# Altium PCB PSNEM-MAIN-BOARD.PcbDoc
Units mil, origin at the board's own origin, x right, y up, seen from the top; angles counter-clockwise.
Board outline 7940 x 5930 mil, 6 copper layers (Top Layer, 5V, 3.3V, GROUND, Layer 2, Bottom Layer), stack 32.112 mil thick; 62 components, 38 nets, 237 pads, 14 vias.
Unrouted connection lines stored in the file: 118.
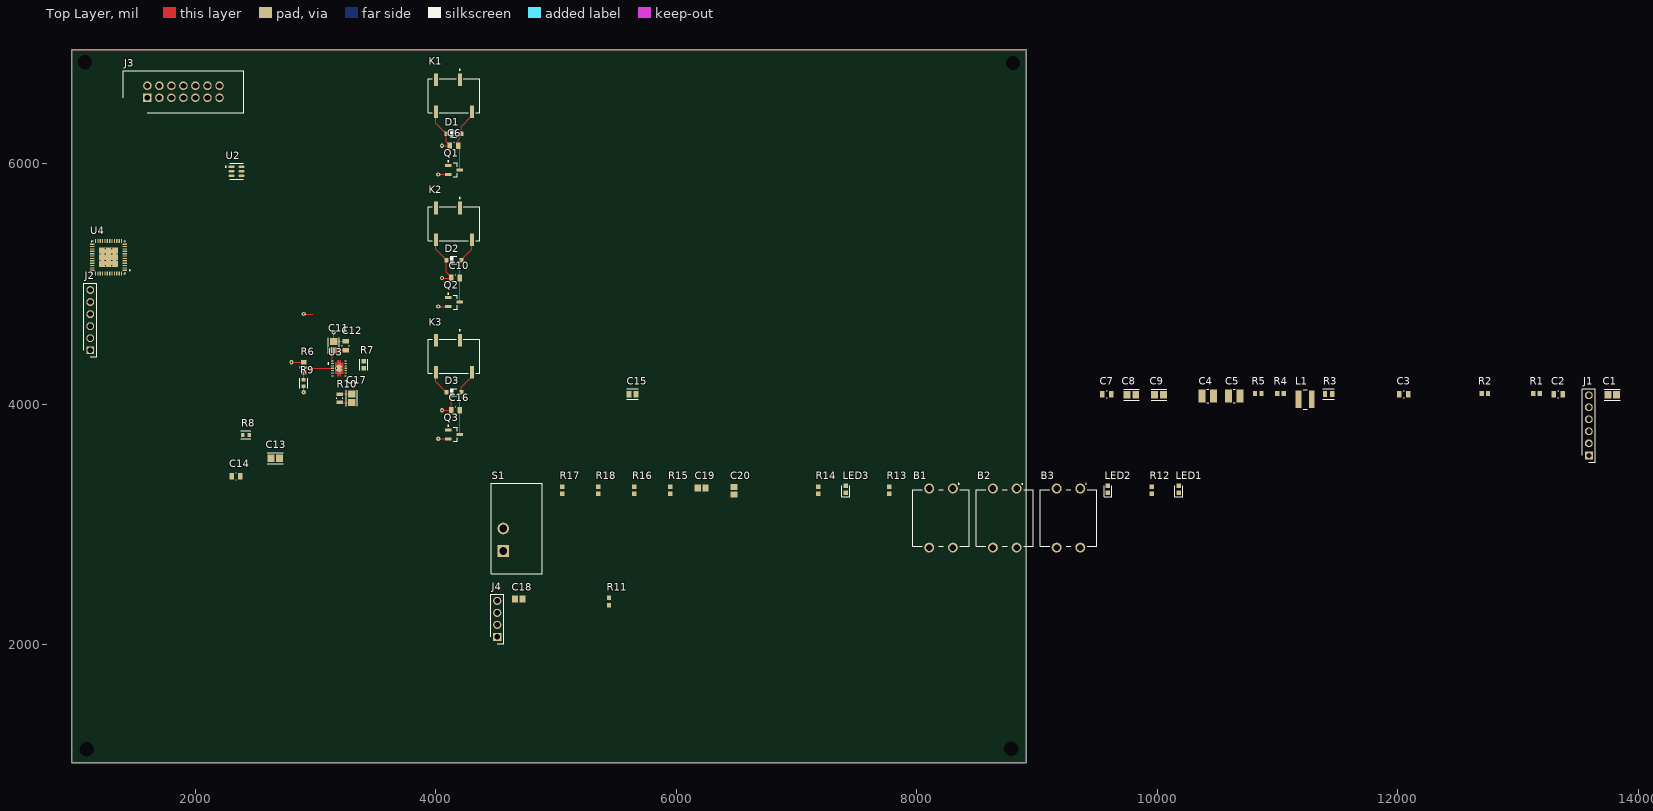
[diagram p0: Top Layer view]
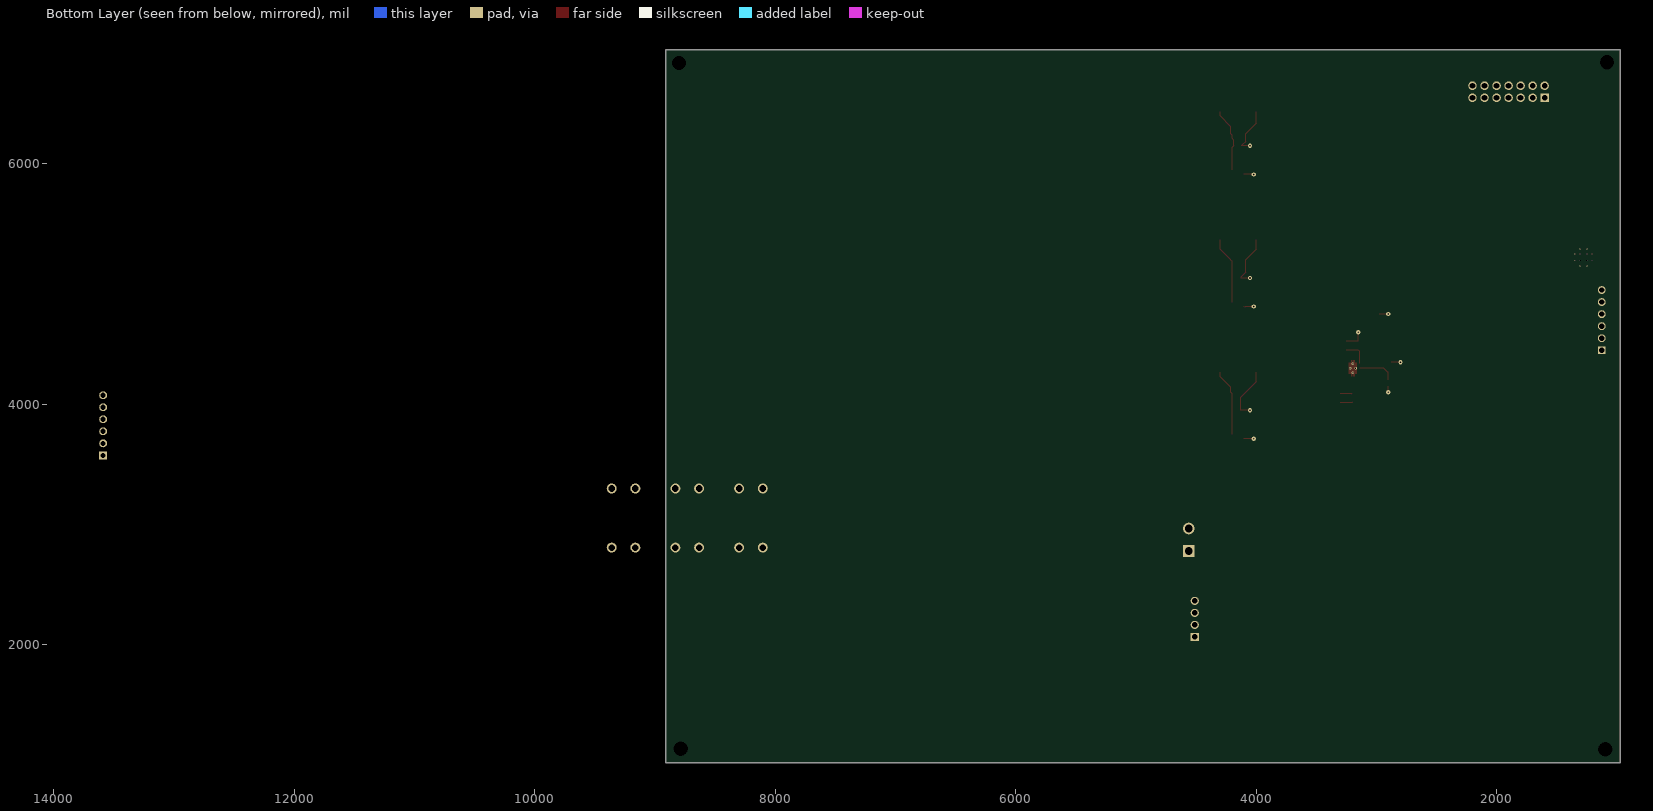
[diagram p1: Bottom Layer view, seen from below]
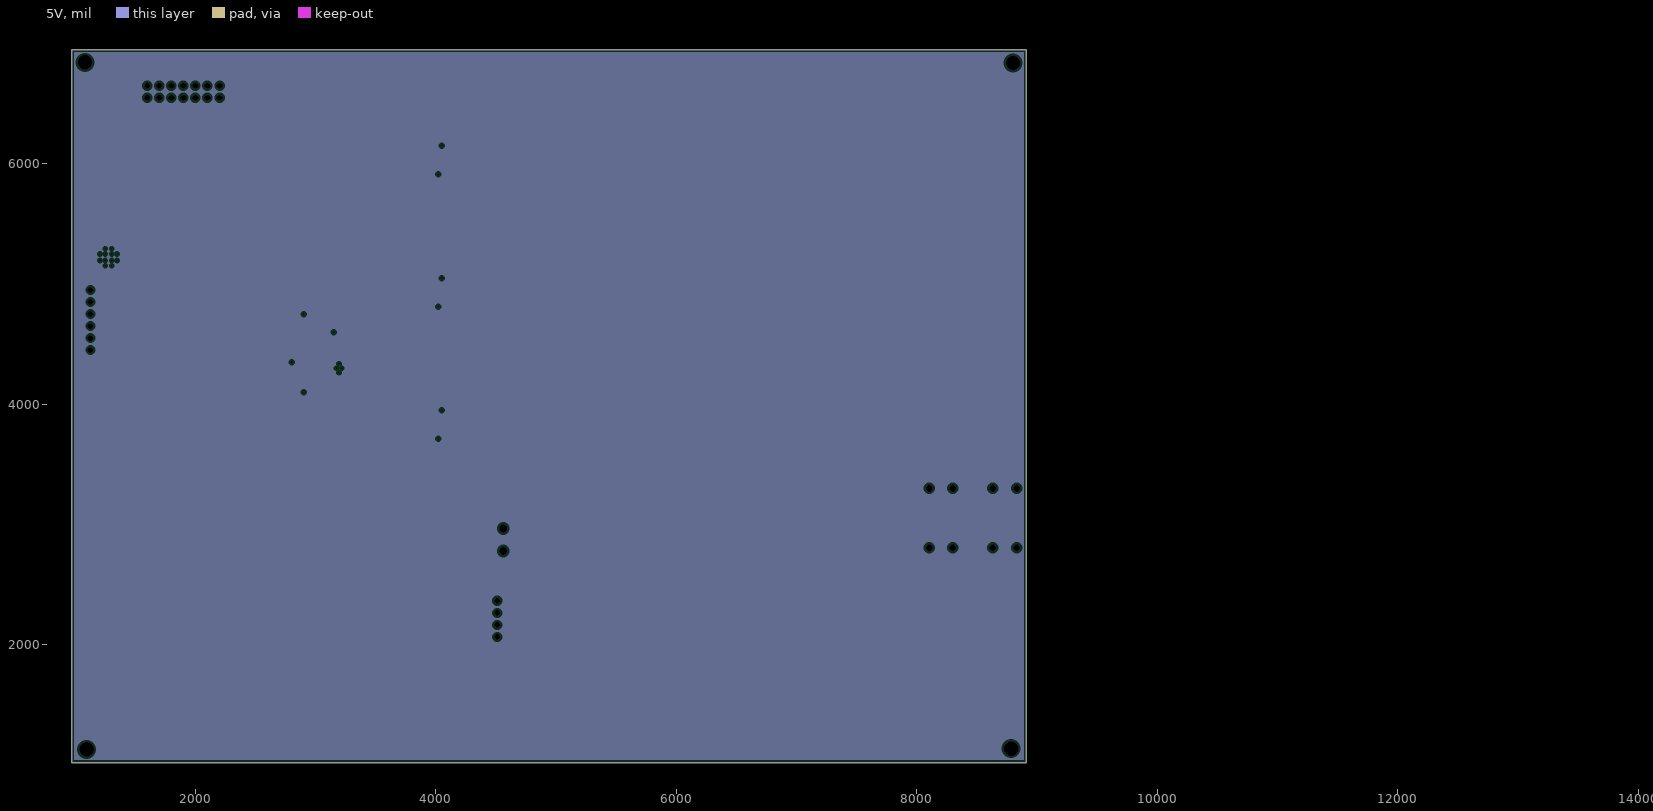
[diagram p2: 5V, clearances drawn from the general rule]
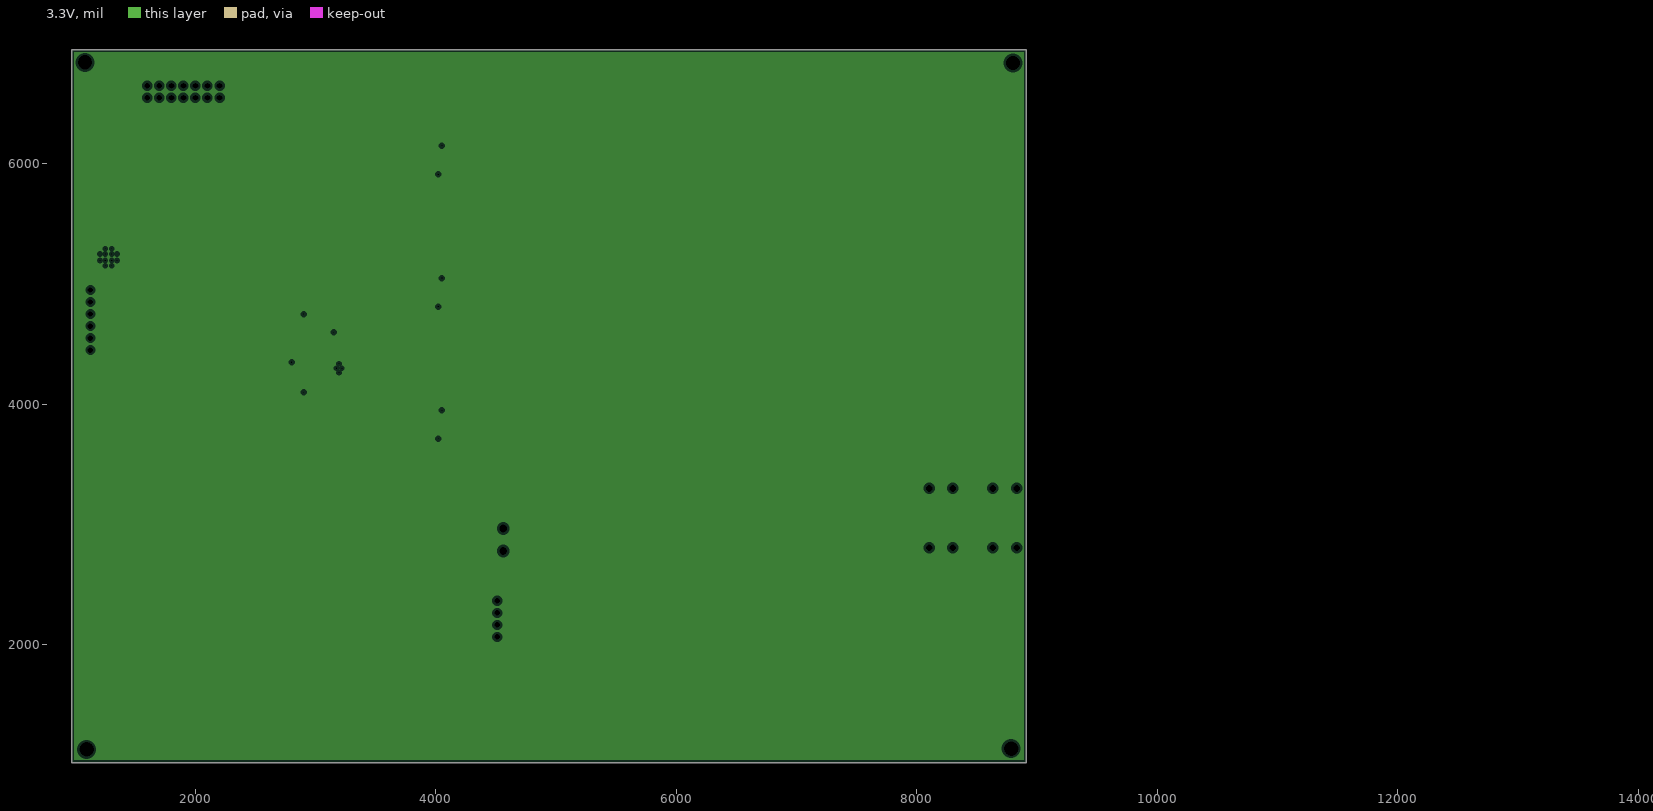
[diagram p3: 3.3V, clearances drawn from the general rule]
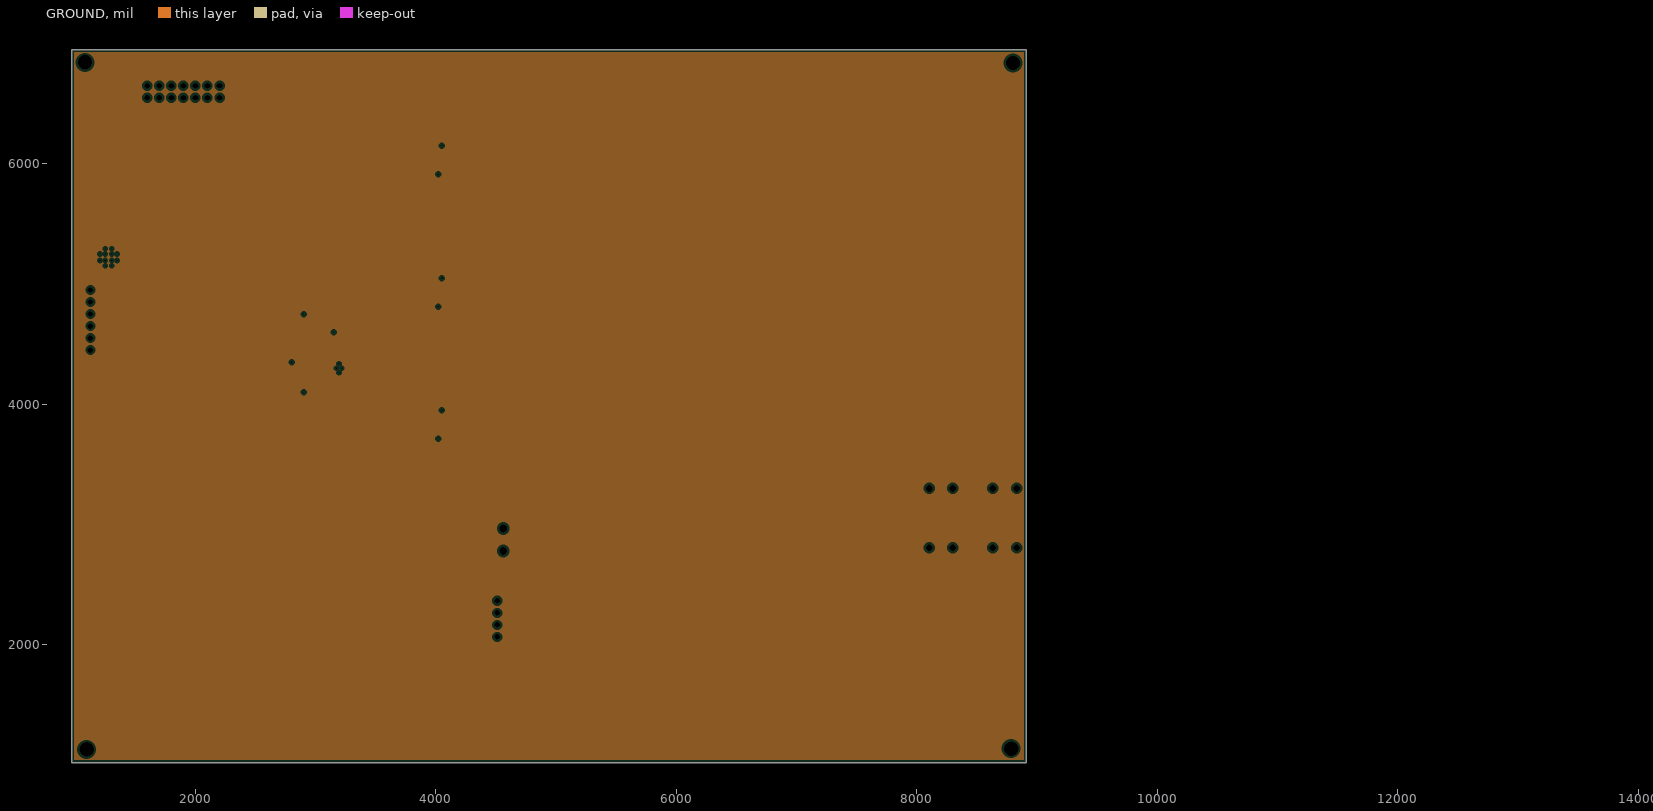
[diagram p4: GROUND, clearances drawn from the general rule]
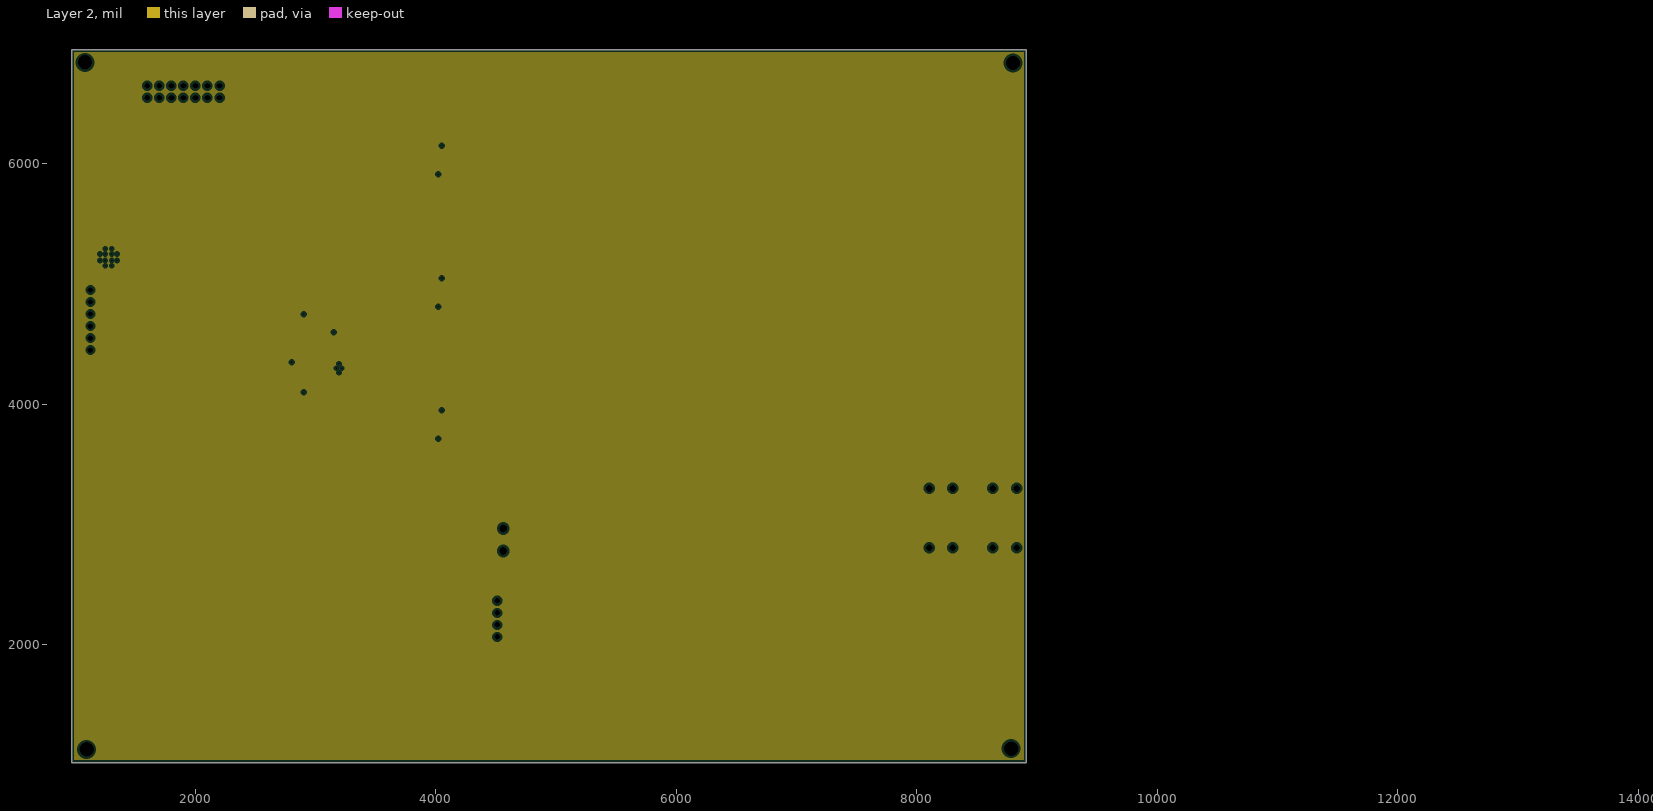
[diagram p5: Layer 2, clearances drawn from the general rule]

## Layer stack, top to bottom
Top Solder: solder mask 0.4, Solder Resist, Dk 3.5
Top Layer: signal copper 1.4
Dielectric 4: prepreg 2.8, PP-006, Dk 4.1
5V: plane copper 1.378
Dielectric 2: prepreg 2.8, PP-006, Dk 4.1
3.3V: plane copper 1.378
Dielectric 1: dielectric 12.6, FR-4, Dk 4.8
GROUND: plane copper 1.378
Dielectric 3: prepreg 2.8, PP-006, Dk 4.1
Layer 2: plane copper 1.378
Dielectric 5: prepreg 2.8, PP-006, Dk 4.1
Bottom Layer: signal copper 1.4
Bottom Solder: solder mask 0.4, Solder Resist, Dk 3.5

## Board outline
970,1020 970,6950 8910,6950 8910,1020

## Design rules (kind name [scope] priority, off if disabled: settings)
Clearance [All] p1: gap=10 ignorepadtopadclearanceinfootprint=FALSE
PlaneClearance [All] p1: clearance=20
PlaneConnect [All] p1: planeconnectstyle=Relief reliefexpansion=20 reliefentries=4 reliefconductorwidth=10 reliefairgap=10
PolygonConnect [All] p1: connectstyle=Relief reliefconductorwidth=10 reliefentries=4 polygonreliefangle="90 Angle" airgapwidth=10
RoutingVias [All] p1: holewidth=28 width=50 viastyle="Through Hole" minholewidth=28 minwidth=50 maxholewidth=28 maxwidth=50
SolderMaskExpansion [All] p1: expansion=4 istentingtop=FALSE
SupplyNets "Schematic Supply Nets_2" [InNet('+5V')] p1: voltage=0.000
SupplyNets "Schematic Supply Nets_1" [InNet('+3.3V')] p2: voltage=0.000
SupplyNets "Schematic Supply Nets" [InNet('GND')] p3: voltage=0.000
Width [All] p1: maxlimit=10 minlimit=10 preferedwidth=10
28 further rules are at their usual default settings.

## Classes and differential pairs
component class U_PowerDACSUB: C1 C2 C3 C4 C5 C6 C7 C8 C9 C10 C11 C12 C13 C14 C15 C16 C17 D1 D2 D3 J1 J2 K1 K2 K3 L1 Q1 Q2 Q3 R1 R2 R3 R4 R5 R6 R7 R8 R9 R10 U1 U2 U3
component class U_MicroController: B1 B2 B3 C19 C20 LED1 LED2 LED3 R12 R13 R14 R15 R16 R17 R18 S1 U4
component class U_Connectors: C18 J3 J4 R11

## Components (designator, comment, footprint, x,y, rotation, side; value= is the part's Value field where it differs from the comment)
B1 "FSM101" FSM101 8190,3050 r90 top
B2 "FSM101" FSM101 8720,3050 r90 top
B3 "FSM101" FSM101 9250,3050 r90 top
C1 "10u" FP-CL21-IPC_A 13785,4080 r0 top
C2 "0.1u" FP-CC0805-0_85-MFG 13335,4085 r0 top value="100 nF"
C3 "0.1u" FP-CC0805-0_85-MFG 12050,4085 r0 top value="100 nF"
C4 "22u" FP-CL32-IPC_C 10420,4070 r0 top
C5 "22u" FP-CL32-IPC_C 10640,4070 r0 top
C6 "0.1u" FP-CC0805-0_85-MFG 4150,6150 r0 top value="100 nF"
C7 "0.1u" FP-CC0805-0_85-MFG 9580,4085 r0 top value="100 nF"
C8 "10u" FP-CL21-IPC_A 9785,4080 r0 top
C9 "10u" FP-CL21-IPC_A 10015,4080 r0 top
C10 "0.1u" FP-CC0805-0_85-MFG 4163.58,5050 r0 top value="100 nF"
C11 "10u" FP-CL21-IPC_A 3150,4486.45 r270 top
C12 "0.1u" FP-CC0805-0_85-MFG 3250,4486.42 r270 top value="100 nF"
C13 "10u" FP-CL21-IPC_A 2663.55,3550 r0 top
C14 "0.1u" FP-CC0805-0_85-MFG 2336.42,3400 r0 top value="100 nF"
C15 "10u" FP-CL21-IPC_C 5635,4085 r0 top
C16 "0.1u" FP-CC0805-0_85-MFG 4163.58,3950 r0 top value="100 nF"
C17 "4.7u" FP-CL21-IPC_A 3300,4050 r270 top
C18 "2.2n" "0805 Cap" 4690,2380 r0 top
C19 "1u" "0805 Cap" 6210,3305 r0 top
C20 "0.1u" "0805 Cap" 6480,3280 r90 top
D1 "1N4148W-7-F" DIOD-SOD123-2_V 4150,6250 r180 top
D2 "1N4148W-7-F" DIOD-SOD123-2_V 4150,5200 r180 top
D3 "1N4148W-7-F" DIOD-SOD123-2_V 4150,4100 r180 top
J1 "61300611121" 61300611121 13590,3575 r90 top
J2 "61300611121" 61300611121 1125,4450 r90 top
J3 "0702461402" 0702461402 1900,6600 r0 top
J4 "61300411121" 61300411121 4510,2215 r90 top
K1 "G6L-1F-DC5" FP-G6L-1F-DC5-MFG 4150,6567.32 r180 top
K2 "G6L-1F-DC5" FP-G6L-1F-DC5-MFG 4150,5500 r180 top
K3 "G6L-1F-DC5" FP-G6L-1F-DC5-MFG 4150,4400 r180 top
L1 "3.3u" FP-NR4018-MFG 11230,4040 r0 top
LED1 "150060VS75000" 150060VS75000 10180,3295 r90 top
LED2 "150060VS75000" 150060VS75000 9590,3295 r90 top
LED3 "150060VS75000" 150060VS75000 7410,3295 r90 top
Q1 "2N7002" INF-PG-SOT23_M#1 4150,5950 r0 top
Q2 "2N7002" INF-PG-SOT23_M#2 4150,4850 r0 top
Q3 "2N7002" INF-PG-SOT23_M#2 4150,3750 r0 top
R1 "10k" RESC1609X50X30ML10T20 13155,4090 r0 top
R2 "10k" RESC1609X50X30ML10T20 12725,4090 r0 top
R3 "33.2k" FP-CR0805-IPC_C 11425,4085 r0 top
R4 "10k" RESC1609X50X30ML10T20 11025,4090 r0 top
R5 "10k" RESC1609X50X30ML10T20 10840,4090 r0 top
R6 "22.6k" FP-RT0805-MFG 2900,4308.66 r90 top value=22.6KΩ
R7 "1.5M" FP-MCR03-IPC_B 3400,4328.62 r90 top
R8 "100k" FP-RK73H1J-IPC_C 2420,3745 r0 top
R9 "100k" FP-RK73H1J-IPC_C 2900,4176.59 r90 top
R10 "22.1k" FP-CRCW0805-e3-IPC_C 3200,4050 r90 top
R11 "47K" RESC1608X06N 5440,2360 r90 top
R12 "64.9" RESC1608X06N 9955,3285 r90 top
R13 "64.9" RESC1608X06N 7770,3285 r90 top
R14 "64.9" RESC1608X06N 7180,3285 r90 top
R15 "10K" RESC1608X06N 5950,3285 r90 top
R16 "10K" RESC1608X06N 5650,3285 r90 top
R17 "10K" RESC1608X06N 5050,3285 r90 top
R18 "10K" RESC1608X06N 5350,3285 r90 top
S1 "L101011MS02Q" L101011MS02Q 4560,2780 r0 top
U2 "TPS562201DDCR" FP-DDC0006A-IPC_C 2341.35,5937.4 r0 top
U3 "TPS7A9401DSCR" FP-DSC0010J-MFG 3194.88,4300 r0 top
U4 "MSP430FR5969IRGZR" MSP430FR5969IRGZR 1276.97,5223.03 r180 top

## Footprints (in the part's own frame and the unit in brackets; to place one, negate y for a bottom-side part, rotate by r counter-clockwise, add the part's x,y. Pads: shape width x height; smd on the part's side, far side on the other; paste and mask are expansions set on the pad)
"0805 Cap" [mm] "Chip Capacitor, 2-Leads, Body 2.00x1.25mm, IPC Medium Density"
  rect 1.3x1.45 smd: 1(-0.8,0) 2(0.8,0)
  body extent -1.1,-0.72 1.1,0.72, height 1.45
150060VS75000 [mm] "LED GREEN CLEAR 0603 SMD"
  rect 0.95x0.95 smd: 1(-0.75,0) 2(0.75,0)
  silkscreen extent -1.58,-0.82 0.75,0.82, body extent -0.8,-0.4 0.8,0.4, height 0.7
0702461402 [mm] "Connector Header Through Hole 14 position 0.100\" (2.54mm)"
  rect 1.8x1.8 / inner round 1.8 / far side rect 1.8x1.8 hole 1.2: 1(-7.62,-1.27)
  round 1.8 hole 1.2: 2(-7.62,1.27) 3(-5.08,-1.27) 4(-5.08,1.27) 5(-2.54,-1.27) 6(-2.54,1.27) 7(0,-1.27) 8(0,1.27) 9(2.54,-1.27) 10(2.54,1.27) 11(5.08,-1.27) 12(5.08,1.27) 13(7.62,-1.27) 14(7.62,1.27)
  silkscreen extent -12.7,-4.44 12.7,4.44, body extent -12.7,-4.44 12.7,4.44, height 9.3
61300411121 [mm] "Connector Header Through Hole 4 position 0.100\" (2.54mm)"
  rect 1.725x1.725 / inner round 1.725 / far side rect 1.725x1.725 hole 1.15: 1(-3.81,0)
  round 1.725 hole 1.15: 2(-1.27,0) 3(1.27,0) 4(3.81,0)
  silkscreen extent -5.23,-1.37 5.23,1.37, body extent -5.08,-1.27 5.08,1.27, height 7.27
61300611121 [mm] "Connector Header Through Hole 6 position 0.100\" (2.54mm)"
  rect 1.65x1.65 / inner round 1.65 / far side rect 1.65x1.65 hole 1.1: 1(0,0)
  round 1.65 hole 1.1: 2(2.54,0) 3(5.08,0) 4(7.62,0) 5(10.16,0) 6(12.7,0)
  silkscreen extent -1.42,-1.35 14.12,1.35, body extent -1.27,-1.27 13.97,1.27, height 8.69
DIOD-SOD123-2_V [mm] "SOD123, 2-Leads, Body 2.7x1.55mm, Height 1.45mm"
  rect 0.9x0.95 smd: 1(-1.575,0) 2(1.575,0)
  silkscreen extent -0.64,-0.83 0.64,0.77, body extent -1.35,-0.77 1.35,0.77, height 1.45
FP-CC0805-0_85-MFG [mm]
  rect 0.95x1.4 smd paste+0 mask+0: 1(-0.925,0) 2(0.925,0)
  silkscreen extent -0.08,-0.72 0.08,0.72, body extent -1.6,-1.05 1.6,1.05, height 0.25
FP-CL21-IPC_A [mil]
  rect 57.27x61.27 smd paste+0 mask+0: 1(-36.45,0) 2(36.45,0)
  silkscreen extent -65,-46 65,46, body extent -85,-50 85,50, height 10
FP-CL21-IPC_C [mil]
  rect 41.52x53.39 smd paste+0 mask+0: 1(-28.57,0) 2(28.57,0)
  silkscreen extent -49,-44 49,44, body extent -53,-32 53,32, height 10
FP-CL32-IPC_C [mil]
  rect 57.19x106.46 smd paste+0 mask+0: 1(-48.24,0) 2(48.24,0)
  silkscreen extent -8,-55 8,55, body extent -81,-59 81,59, height 10
FP-CR0805-IPC_C [mil]
  rect 33.79x49.69 smd paste+0 mask+0: 1(-30.59,0) 2(30.59,0)
  silkscreen extent -47,-42 47,42, body extent -51,-31 51,31, height 10
FP-CRCW0805-e3-IPC_C [mil]
  rect 31.75x51.5 smd paste+0 mask+0: 1(-33.5,0) 2(33.5,0)
  silkscreen extent -3,-25 3,25, body extent -53,-31 53,31, height 10
FP-DDC0006A-IPC_C [mm]
  rect 1.254x0.532 smd paste+0 mask+0: 1(-1.05,0.95)
  rrect100% 1.254x0.532 smd paste+0 mask+0: 2(-1.05,0) 3(-1.05,-0.95) 4(1.05,-0.95) 5(1.05,0) 6(1.05,0.95)
  silkscreen extent -2.37,-1.7 1.4,1.7, body extent -1.78,-1.55 1.78,1.55, height 0.25
FP-DSC0010J-MFG [mm]
  rrect42% 0.6x0.24 smd paste+0 mask+0: 1(-1.4,1) 2(-1.4,0.5) 3(-1.4,0) 4(-1.4,-0.5) 5(-1.4,-1) 6(1.4,-1) 7(1.4,-0.5) 8(1.4,0) 9(1.4,0.5) 10(1.4,1)
  round 1.485 smd paste-1000 mask+0: 11(0,0)
  Top Layer region: -0.375,-1.2 -0.375,-1.65 -0.371,-1.669 -0.36,-1.685 -0.344,-1.696 -0.325,-1.7 -0.325,-1.7 -0.175,-1.7 -0.156,-1.696 -0.14,-1.685 -0.129,-1.669 -0.125,-1.65 -0.125,-1.65 -0.125,-1.2 0.125,-1.2 0.125,-1.65 0.129,-1.669 0.14,-1.685 0.156,-1.696 0.175,-1.7 0.175,-1.7 0.325,-1.7 0.344,-1.696 0.36,-1.685 0.371,-1.669 0.375,-1.65 0.375,-1.65 0.375,-1.2 0.775,-1.2 0.794,-1.196 0.81,-1.185 0.821,-1.169 0.825,-1.15 0.825,-1.15 0.825,1.15 0.818,1.175 0.8,1.193 0.775,1.2 0.775,1.2 0.375,1.2 0.375,1.65 0.368,1.675 0.35,1.693 0.325,1.7 0.325,1.7 0.175,1.7 0.156,1.696 0.14,1.685 0.129,1.669 0.125,1.65 0.125,1.65 0.125,1.2 -0.125,1.2 -0.125,1.65 -0.132,1.675 -0.15,1.693 -0.175,1.7 -0.175,1.7 -0.325,1.7 -0.344,1.696 -0.36,1.685 -0.371,1.669 -0.375,1.65 -0.375,1.65 -0.375,1.2 -0.775,1.2 -0.794,1.196 -0.81,1.185 -0.821,1.169 -0.825,1.15 -0.825,1.15 -0.825,-1.15 -0.821,-1.169 -0.81,-1.185 -0.794,-1.196 -0.775,-1.2 -0.775,-1.2 -0.775,-1.2
  silkscreen extent -2.4,-1.55 1.55,1.55, body extent -1.8,-1.8 1.8,1.8, height 0.25
FP-G6L-1F-DC5-MFG [mm]
  rect 0.8x2.66 smd paste+0 mask+0: 2(-1.27,-3.37) 4(3.81,-3.37) 5(3.81,3.37) 8(-3.81,3.37)
  silkscreen extent -5.4,-5.6 5.4,3.6, body extent -5.5,-4.8 5.5,4.8, height 0.25
FP-MCR03-IPC_B [mil]
  rect 37.72x35.91 smd paste+0 mask+0: 1(-28.62,0) 2(28.62,0)
  silkscreen extent -47,-34 47,34, body extent -57,-28 57,28, height 10
FP-NR4018-MFG [mm]
  rect 1.2x3.7 smd paste+0 mask+0: 1(-1.4,0) 2(1.4,0)
  silkscreen extent -0.43,-2.1 0.43,2.1, body extent -2.2,-2.2 2.2,2.2, height 0.25
FP-RK73H1J-IPC_C [mil]
  rect 29.75x31.97 smd paste+0 mask+0: 1(-26.59,0) 2(26.59,0)
  silkscreen extent -41,-33 41,33, body extent -45,-22 45,22, height 10
FP-RT0805-MFG [mm]
  rect 0.9x1.2 smd paste+0 mask+0: 1(-1.05,0) 2(1.05,0)
  silkscreen extent -0.23,-0.67 0.23,0.67, body extent -1.6,-0.77 1.6,0.77, height 0.25
FSM101 [mm] "Tactile Switch SPST-NO Top Actuated Through Hole"
  round 2.1 hole 1.4: 1(6.35,-2.794) 2(-6.15,-2.794) 3(6.35,2.206) 4(-6.15,2.206)
  silkscreen extent -5.9,-6.29 7.4,5.71, body extent -6.85,-6.29 6.85,5.72, height 7.6
INF-PG-SOT23_M#1 [mm] "SOT23, 3-Leads, Body 2.9x1.3mm, Pitch 0.95mm, IPC Low Density"
  rect 1.35x0.6 smd: 1(-1.2,0.95) 3(1.2,0) ""(-1.2,-0.95)
  silkscreen extent -1.32,-1.5 0.7,1.92, body extent -0.7,-1.5 0.7,1.5, height 1.1
INF-PG-SOT23_M#2 [mm] "SOT23, 3-Leads, Body 2.9x1.3mm, Pitch 0.95mm, IPC Low Density"
  rect 1.35x0.6 smd: 1(-1.2,0.95) 2(-1.2,-0.95) 3(1.2,0)
  silkscreen extent -1.32,-1.5 0.7,1.92, body extent -0.7,-1.5 0.7,1.5, height 1.1
L101011MS02Q [mm] "SWITCH SLIDE SPST 4A 125V"
  rect 2.475x2.475 hole 1.65: 1(0,0)
  round 2.475 hole 1.65: 2(0,4.75)
  silkscreen extent -2.55,-4.8 8.25,14.3, body extent -2.6,-4.85 8.19,14.25, height 14.1
MSP430FR5969IRGZR [mm] "MSP430 CPUXV2 MSP430™ FRAM Microcontroller IC 16-Bit 16MHz 64KB (64K x 8) FRAM 48-VQFN (7x7)"
  rrect25% 0.88x0.26 smd: 1(-3.435,2.75) 2(-3.435,2.25) 3(-3.435,1.75) 4(-3.435,1.25) 5(-3.435,0.75) 6(-3.435,0.25) 7(-3.435,-0.25) 8(-3.435,-0.75) 9(-3.435,-1.25) 10(-3.435,-1.75) 11(-3.435,-2.25) 12(-3.435,-2.75) 25(3.435,-2.75) 26(3.435,-2.25) 27(3.435,-1.75) 28(3.435,-1.25) 29(3.435,-0.75) 30(3.435,-0.25) 31(3.435,0.25) 32(3.435,0.75) 33(3.435,1.25) 34(3.435,1.75) 35(3.435,2.25) 36(3.435,2.75)
  rrect25% 0.26x0.88 smd: 13(-2.75,-3.435) 14(-2.25,-3.435) 15(-1.75,-3.435) 16(-1.25,-3.435) 17(-0.75,-3.435) 18(-0.25,-3.435) 19(0.25,-3.435) 20(0.75,-3.435) 21(1.25,-3.435) 22(1.75,-3.435) 23(2.25,-3.435) 24(2.75,-3.435) 37(2.75,3.435) 38(2.25,3.435) 39(1.75,3.435) 40(1.25,3.435) 41(0.75,3.435) 42(0.25,3.435) 43(-0.25,3.435) 44(-0.75,3.435) 45(-1.25,3.435) 46(-1.75,3.435) 47(-2.25,3.435) 48(-2.75,3.435)
  rect 4.1x4.1 smd paste-1.465: 49(0,0)
  round 0.3 hole 0.2: 50(-0.685,1.8) 51(0.685,1.8) 52(-1.8,0.685) 53(-0.685,0.685) 54(0.685,0.685) 55(1.8,0.685) 56(-1.8,-0.685) 57(-0.685,-0.685) 58(0.685,-0.685) 59(1.8,-0.685) 60(-0.685,-1.8) 61(0.685,-1.8)
  silkscreen extent -4.62,-3.5 3.5,3.5, body extent -3.5,-3.5 3.5,3.5, height 1
RESC1608X06N [mm] "Chip Resistor, 2-Leads, Body 1.60x0.80mm, IPC Medium Density"
  rect 0.95x0.9 smd: 1(-0.775,0) 2(0.775,0)
  body extent -0.9,-0.45 0.9,0.45, height 0.55
RESC1609X50X30ML10T20 [mm] "Chip Resistor, 2-Leads, Body 1.55x0.85mm, IPC Low Density"
  rect 0.9x1.05 smd: 1(-0.675,0) 2(0.675,0)
  body extent -0.82,-0.48 0.82,0.48, height 0.5

## Part data
B1 B2 B3: "Tactile Switch SPST-NO Top Actuated Through Hole"
C1 C8 C9 C11 C13: library part CMP-13271-002172-1, "CL21 Series 0805 10uF 25V ±10% Tolerance X5R Multilayer Ceramic Chip Capacitor", Capacitance=10uF, Case Code (Imperial)=0805, Case Code (Metric)=2012, Dielectric=X5R, Max Operating Temperature=85°C, Min Operating Temperature=-55°C, Package Quantity=1, Tolerance=10%, Voltage Rating=25V, Case/Package=0805, Depth=1.25mm, Height=0.85mm, Lead Free="Lead Free", Length=2mm, Mount="Surface Mount", Packaging="Tape and Reel", Radiation Hardening=No, Thickness=0.037inch, Width=0.049inch
C2 C12 C14: library part CMP-2100-03606-3, "CAP CER 0.1UF 50V X7R 0805", Capacitance="100 nF", Manufacturer=Yageo, Manufacturer Part Number=CC0805KRX7R9BB104, Package=CC0805-0.85, Temperature="-30°C to +85°C", Temperature Characteristic=X7R, Temperature Range High=+85°C, Temperature Range Low=-30°C, Tolerance=0.1, Voltage Rating="50 V", Automotive=No, Category=Cap, ComponentLink2Description=Datasheet, ComponentLink2URL=http://www.yageo.com/documents/recent/UPY-GPHC_Y5V_6.3V-to-50V_8.pdf, Device Class L1="Passive Components", Device Class L2=Capacitors, Device Class L3="Ceramic Capacitors", Digikey Description="CAP CER 0.1UF 50V X7R 0805", Footprint Url=http://www.yageo.com/exep/pages/download/literatures/UPY-C_GEN_24.pdf, Height=0.95mm, Ipc Land Pattern Name=CAPC200125X85, Lead Free=Yes, Material=Ceramic, Mouser Description="Multilayer Ceramic Capacitors MLCC - SMD/SMT 100nF 50V X7R 10%", Octopart=https://octopart.com/cc0805krx7r9bb104-yageo-192993, RoHS=TRUE
C3 C6 C7 C10 C16: library part CMP-2100-03606-3, Capacitance="100 nF", Manufacturer=Yageo, Manufacturer Part Number=CC0805KRX7R9BB104, Package=CC0805-0.85, Temperature="-30°C to +85°C", Temperature Characteristic=X7R, Temperature Range High=+85°C, Temperature Range Low=-30°C, Tolerance=0.1, Voltage Rating="50 V", Automotive=No, Category=Cap, ComponentLink2Description=Datasheet, ComponentLink2URL=http://www.yageo.com/documents/recent/UPY-GPHC_Y5V_6.3V-to-50V_8.pdf, Device Class L1="Passive Components", Device Class L2=Capacitors, Device Class L3="Ceramic Capacitors", Digikey Description="CAP CER 0.1UF 50V X7R 0805", Footprint Url=http://www.yageo.com/exep/pages/download/literatures/UPY-C_GEN_24.pdf, Height=0.95mm, Ipc Land Pattern Name=CAPC200125X85, Lead Free=Yes, Material=Ceramic, Mouser Description="Multilayer Ceramic Capacitors MLCC - SMD/SMT 100nF 50V X7R 10%", Octopart=https://octopart.com/cc0805krx7r9bb104-yageo-192993, RoHS=TRUE
C4 C5: library part CMP-13271-003500-1, "Cap Ceramic 22uF 16V X7R ±10% SMD 1210 +125°C Embossed T/R", Capacitance=22uF, Case Code (Imperial)=1210, Case Code (Metric)=3225, Dielectric=X7R, Max Operating Temperature=125°C, Min Operating Temperature=-55°C, Package Quantity=1, Tolerance=10%, Voltage=10V, Voltage Rating=16V, Case/Package=1210, Depth=2.5mm, Height=2.5mm, Lead Free="Lead Free", Length=3.2mm, Material=Ceramic, Mount="Surface Mount", Packaging="Tape and Reel", Radiation Hardening=No, Thickness=0.106inch, Voltage Rating (DC)=16V, Width=0.098inch
C15: library part CMP-13271-002245-1, "CL21 Series 0805 10uF 10V ±20% Tolerance X5R Multilayer Ceramic Chip Capacitor", Capacitance=10uF, Case/Package=0805, Dielectric=X5R, Max Operating Temperature=85°C, Min Operating Temperature=-55°C, Package Quantity=10000, Tolerance=20%, Voltage Rating=10V, Depth=1.25mm, Height=1.25mm, Length=2mm, Mount="Surface Mount", Packaging="Tape and Reel", Radiation Hardening=No, Thickness=0.053inch, Voltage Rating (DC)=10V, Width=0.049inch
C17: library part CMP-13271-002624-1, "CL21 Series 0805 4.7uF 25V ±10% Tolerance X5R Multilayer Ceramic Chip Capacitor", Capacitance=4.7uF, Case Code (Imperial)=0805, Case Code (Metric)=2012, Dielectric=X5R, Max Operating Temperature=85°C, Min Operating Temperature=-55°C, Package Quantity=1, Tolerance=10%, Voltage Rating=25V, Case/Package=0805, Depth=1.25mm, Height=1.25mm, Lead Free="Lead Free", Length=2mm, Mount="Surface Mount", Packaging="Tape and Reel", Radiation Hardening=No, Thickness=0.055inch, Voltage Rating (DC)=25V, Width=0.049inch
C18: library part CC0805KRX7R9BB222, "2200 pF ±10% 50V Ceramic Capacitor X7R 0805 (2012 Metric)"
C19: library part CC0805KKX7R7BB105, "1 µF ±10% 16V Ceramic Capacitor X7R 0805 (2012 Metric)"
C20: library part CC0805KRX7R9BB104, "0.1 µF ±10% 50V Ceramic Capacitor X7R 0805 (2012 Metric)"
D1 D2 D3: library part CMP-2000-04932-2, "Fast Switching Diode, 100 V, 0.15 A, -65 to 150 degC, 2-Pin?SOD123, RoHS, Tape and Reel", If - Forward Current=0.15A, Ir - Reverse Current=1uA, Manufacturer=DiodesIncorporated, Max Surge Current=2A, Maximum Operating Temperature=+150C, Minimum Operating Temperature=-65C, Operating Temperature Range=-65Cto+150C, Package / Case=SOD-123, Package Reference=SOD123-2, Peak Reverse Voltage=100V, Vf - Forward Voltage=1.25V, Brand=DiodesIncorporated, Configuration=Single, Datasheet URL=http://www.farnell.com/datasheets/1915529.pdf, Datasheet Version="Rev. 24-2, 10/2013", Factory Pack Quantity=3000, Height=1.25mm, Length=2.85mm, Manufacturer URL=http://www.diodes.com/, Mounting Style=SMD/SMT, Package URL=http://www.diodes.com/datasheets/ds18004.pdf, Packaging=Reel, Product=SwitchingDiodes, Product Category=Diodes-GeneralPurpose,Power,Switching, Recovery Time=4ns, RoHS=True, Series=1N4148, Type=SwitchingDiode, Unit Weight=0.000353oz, Width=1.7mm
J1 J2: "CONN HEADER VERT 6POS 2.54MM"
J3: "Connector Header Through Hole 14 position 0.100\" (2.54mm)"
J4: "Connector Header Through Hole 4 position 0.100\" (2.54mm)"
K1 K2 K3: library part CMP-08823-000020-1, "RELAY TELECOM SPST 1A 5VDC", Ambient Temperature Range High=+70°C, Ambient Temperature Range Low=-40°C, Coil Current=36mA, Coil Power=180mW, Coil Resistance=139Ω, Coil Voltage=5V, Current Rating=1A, Manufacturer=Omron, Temperature="-40°C to +70°C", Automotive=No, Category=Relay, Coil Type=Non-Latching, ComponentLink2Description=Datasheet, ComponentLink2URL=https://media.digikey.com/pdf/Data%20Sheets/Omron%20PDFs/G6L.pdf, Device Class L1=Electromechanical, Device Class L2=Relays, Device Class L3="Signal Relays", Digikey Description="RELAY TELECOM SPST 1A 5VDC", Height=4.4mm, Lead Free=Yes, Manufacturer Part Number=G6L-1F-DC5, Mouser Description="Low Signal Relays - PCB LO PROF SPST 5VDC", Number Of Contacts=1, Octopart=https://octopart.com/g6l-1f+dc5-omron-18903080, Package=G6L-1F-DC5, RoHS=TRUE, Standoff Height=0.4mm, Temperature Range High=+70°C, Temperature Range Low=-40°C, Throw Configuration=SPST-NO
L1: library part CMP-14484-000015-2, "SMD Power Inductors 3.3uH ±20% 2A 66mΩ", Case/Package=Nonstandard, Current Rating=2A, DC Resistance (DCR)=66mR, Inductance=3.3uH, Inductance Tolerance=20%, Max DC Current=2.3A, Max Operating Temperature=125°C, Min Operating Temperature=-25°C, Package Quantity=3500, Resistor Type=Wirewound, Self Resonant Frequency=45MHz, Test Frequency=100kHz, Core Material=Ferrite, Depth=4.2mm, Halogen Free="Halogen Free", Height=1.8mm, Height - Seated (Max)=0.071inch, Lead Free="Lead Free", Lead Pitch=2.8mm, Length=4mm, Mount="Surface Mount", Number of Pins=2, Packaging="Tape and Reel", Radiation Hardening=No, RMS Current (Irms)=2A, RoHS Compliant=Yes, Saturation Current=2.3A, Series=NRS, Shielding=Shielded, Termination=SMD/SMT, Tolerance=20%, Width=0.157inch
LED1 LED2 LED3: "LED GREEN CLEAR 0603 SMD"
Q1 Q2 Q3: library part CMP-1149-00026-1, "N-Channel OptiMOS Small-Signal-Transistor, 60 V VDS, 0.3 A ID, -55 to 150 degC, PG-SOT23, Reel, Green", Manufacturer=Infineon, ComponentLink1Description="Manufacturer URL", ComponentLink1URL=http://www.infineon.com/, ComponentLink2Description=Datasheet, ComponentLink2URL=http://www.infineon.com/dgdl/2N7002_Rev2.4.pdf?folderId=db3a3043156fd573011622e10b5c1f67&fileId=db3a304319bc939a0119c2a9461e79e6, ComponentLink3Description="Package Specification", ComponentLink3URL=http://www.infineon.com/dgdl/SOT23-Package_Overview.pdf?folderId=db3a30431936bc4b0119532290053c66&fileId=db3a30431936bc4b0119533468123c85, DatasheetVersion="Rev. 2.4", Green=TRUE, Halogen-free=TRUE, ID (max)="0.3Â A", IDpuls (max)="1.2Â A", Mounting Technology="Surface Mount", PackageDescription="3-Pin Small Outline Transistor Package, 2.9 x 1.3 mm Body, 0.95 mm Pitch", PackageReference=PG-SOT23, PackageVersion=Apr-08, Packing=Reel, PartNumber=2N7002, Ptot (max)="0.5Â W", QG="0.4Â nC", RDS (on) (max)="3,000 mOhm", RDS (on) (max) (@4.5V)="4,000 mOhm", RthJA (max)="250 K/W", VDS (max)="60 V", VGS(th) (max)="2.5Â V", VGS(th) (min)="1.5Â V"
R1 R2 R4 R5: library part CMP-2000-03837-1, Manufacturer="Vishay Dale", Part Number=CRCW060310K0FKTB
R3: library part CMP-07231-003068-1, "Thick Film Chip Resistors 0805 33.2kΩ 0.125W 1% 100ppm/°C", Case Code (Imperial)=0805, Case Code (Metric)=2012, Max Operating Temperature=155°C, Max Power Dissipation=125mW, Min Operating Temperature=-55°C, Package Quantity=1, Resistance=33.2kR, Temperature Coefficient=100ppm/°C, Tolerance=1%, Voltage Rating=150V, Case/Package=0805, Composition="Thick Film", Contact Plating=Tin, Depth=1.25mm, Features="Moisture Resistant", Height=0.024inch, Length=2mm, Military Standard=Not, Mount="Surface Mount", Number of Terminations=2, Packaging="Tape and Reel", Power Rating=125mW, Radiation Hardening=No, Termination=SMD/SMT, Thickness=508um, Width=0.049inch
R6: library part CMP-2001-01789-2, "RES SMD 22.6K OHM 1% 1/8W 0805", Manufacturer=Yageo, Manufacturer Part Number=RT0805FRE0722K6L, Package=RT0805, Power Rating=0.125W, Resistance=22.6KΩ, Temperature="-55°C to +155°C", Temperature Coefficient="50 ppm/°C", Temperature Range High=+155°C, Temperature Range Low=-55°C, Tolerance=0.0001, Voltage Rating=150V, Automotive=No, Category=Res, ComponentLink2Description=Datasheet, ComponentLink2URL=http://www.yageo.com/documents/recent/PYu-RT_1-to-0.01_RoHS_L_9.pdf, Composition="Thin Film", Device Class L1="Passive Components", Device Class L2=Resistors, Device Class L3="Chip SMD Resistors", Digikey Description="RES SMD 22.6K OHM 1% 1/8W 0805", Footprint Url=http://www.yageo.com/exep/pages/download/literatures/PYu-R_Mount_10.pdf, Height=0.6mm, Ipc Land Pattern Name=RESC200125X50, Lead Free=Yes, Mouser Description="Thin Film Resistors - SMD 1/8W 22.6K ohm 1% 50ppm", Octopart=https://octopart.com/rt0805fre0722k6l-yageo-1479006, RoHS=TRUE, Series=RT
R7: library part CMP-08839-027182-1, "Thick Film Chip Resistor, 0603, 1.5MΩ, 1%, 100ppm/°C, 0.1W, 50V", Case Code (Imperial)=0603, Case Code (Metric)=1608, Max Operating Temperature=155°C, Max Power Dissipation=100mW, Min Operating Temperature=-55°C, Package Quantity=5000, Resistance=1.5MR, Resistor Type="Thick Film", Temperature Coefficient=100ppm/°C, Tolerance=1%, Voltage Rating (DC)=50V, Case/Package=0603, Height=0.022inch, Length=0.063inch, Number of Terminations=2, Packaging="Tape and Reel", RoHS Compliant=Yes, Series=MCR03, Width=0.031inch
R8 R9: library part CMP-04015-074272-1, "100kΩ ±1% 0.1W Chip Resistor 0603 Thick Film AEC-Q200 Qualified", Case Code (Imperial)=0603, Case Code (Metric)=1608, Max Operating Temperature=155°C, Min Operating Temperature=-55°C, Package Quantity=5000, Power Rating=100mW, Resistance=100kR, Temperature Coefficient=100ppm/°C, Tolerance=1%, Voltage Rating=50V, Case/Package=0603, Height=0.45mm, Lead Free="Contains Lead", Length=1.6mm, Packaging="Tape and Reel", Series=RK73H, Termination=SMD/SMT, Width=0.8mm
R10: library part CMP-2001-03689-2, "RES Thick Film, 22.1kΩ, 1%, 0.125W, 100ppm/°C, 0805", Case Code (Imperial)=0805, Case Code (Metric)=2012, Max Operating Temperature=155°C, Max Power Dissipation=125mW, Min Operating Temperature=-55°C, Package Quantity=10, Resistance=22.1kR, Temperature Coefficient=100ppm/°C, Tolerance=1%, Voltage Rating=150V, Case/Package=0805, Composition="Thick Film", Contact Plating=Tin, Depth=1.25mm, Features="Automotive AEC-Q200", Height=0.45mm, Lead Free="Lead Free", Length=2mm, Military Standard=Not, Number of Terminations=2, Packaging="Tape and Reel", Power Rating=125mW, Radiation Hardening=No, Termination=SMD/SMT, Voltage Rating (DC)=150V, Weight=0.000194oz, Width=1.25mm
R11: library part ERA-3VEB4702V, "Thin Film Resistors - SMD 0603 0.1% 47Kohm 25ppm SMD"
R12 R13 R14: library part ERA-3AEB64R9V, "Thin Film Resistors - SMD 0603 64.9ohm 0.1% 25ppm"
R15 R16 R17 R18: library part CRCW060310K0FKEAHP, "RES SMD 10K OHM 1% 1/3W 0603"
S1: "SWITCH SLIDE SPST 4A 125V"
U2: library part CMP-04918-000361-1, "IC REG BUCK ADJ 2A TSOT23-6", Case/Package=SOT, Max Input Voltage=17V, Max Operating Temperature=125°C, Max Output Current=2A, Min Input Voltage=4.5V, Min Operating Temperature=-40°C, Output Voltage=7V, Quiescent Current=400uA, Switching Frequency=580kHz, Contact Plating=Tin, Lead Free="Lead Free", Mount="Surface Mount", Number of Outputs=1, Number of Pins=6, Operating Supply Voltage=17V, Output Type=Adjustable, RoHS Compliant=Yes
U3: library part CMP-04917-000380-1, "1-A, ULTRA-LOW NOISE, ULTRA-HIGH"
U4: "MSP430 CPUXV2 MSP430™ FRAM Microcontroller IC 16-Bit 16MHz 64KB (64K x 8) FRAM 48-VQFN (7x7)"

## Free pads (board coordinates)
  round 0 / inner round 60 / far side round 0 hole 118.11 unplated: 1(1080,6845) 1(1095,1130) 1(8785,1135) 1(8800,6840)

## Via types
v1: diameter 35, hole 15, Top Layer to Bottom Layer, tented top, 10 vias
v2: diameter 19.68, hole 7.87, Top Layer to Bottom Layer, 4 vias

## Nets (pads, with @x,y where several pads share a name; then routed paths per layer and width w, separated by ;. In a path a pad name is that pad's centre, name@x,y a point inside that pad or via, vN(x,y) a via of type N, cw(c..) or ccw(c..) an arc to the next point about the centre after c; other vN are vias at no path point)
+3.3V: C19.2 C20.2 J2.3 J2.4 J3.4 K2.2 R11.2 R15.2 R16.2 R17.2 R18.2 U4.37 U4.48
+5V: C6.1 C7.2 C8.2 C9.2 C10.1 C11.2 C12.2 C16.1 D1.2 D2.2 D3.2 J2.5 J2.6 K1.5 K2.5 K3.5 R4.2 R6.2 U2.3 U3.1 U3.2 | length 1584.8
  Top Layer w10: v1(2800,4350) 2874.8,4350 ; U3.1 3139.76,4439.76 C11.2 C12.2 ; K3.5 4000,4188.98 4087.99,4100.98 D3.2 4087.99,4099.02 4127.17,4059.84 C16.1 ; K2.5 4000,5288.98 4087.99,5200.98 D2.2 4087.99,5098.03 4124.8,5061.22 4124.8,5050 v1(4050,5050) ; K1.5 4000,6338.98 4087.99,6250.98 D1.2 4087.99,6184.45 4113.58,6158.86 C6.1 ; v1(4050,3950) C16.1@4124.8,3950 ; v1(4050,6150) C6.1@4124.8,6150
Buck_Button: B2.1 B2.2 R16.1 U4.3
BuckConv: C4.1 C5.1 K1.2 L1.1 R3.2
DAC_Power: C2.1 C15.1 K1.4 K2.4 K3.4 R2.1
GND: B1.3 B1.4 B2.3 B2.4 B3.3 B3.4 C1.1 C2.2 C4.2 C5.2 C7.1 C8.1 C9.1 C11.1 C12.1 C13.2 C14.2 C15.2 C17.2 C18.1 C19.1 C20.1 J1.1 J2.1 J2.2 J3.9 J4.4 LED1.1 LED2.1 LED3.1 Q1. Q2.2 Q3.2 R1.1 R5.1 R8.2 R9.1 R10.1 S1.2 U2.1 U3.4 U3.6 U4.36 U4.44 U4.47 | length 584.2
  Top Layer w10: v1(2900,4100) R9.1 ; v1(3150,4600) C11.1 3249.94,4522.9 C12.1 ; R10.1 3202.95,4013.55 C17.2 ; v1(4019.36,3712.6) Q3.2 ; v1(4019.36,4812.6) 4089.13,4812.6 4095.94,4805.79 Q2.2 ; v1(4019.36,5912.6) Q1.
LDO: C13.1 C14.1 K3.2 R7.2 U3.8 U3.9 U3.10
LDO_Button: B1.1 B1.2 R15.1 U4.2
LDO_RELAY: U4.5
Mode_Switch: R18.1 S1.1 U4.30
NetC1_2: C1.2
NetC3_1: C3.1 L1.2 U2.2
NetC3_2: C3.2 U2.6
NetC6_2: C6.2 D1.1 K1.8 Q1.3 | length 536.2
  Top Layer w10: Q1.3 4197.24,6139.17 C6.2 4186.42,6197.99 4199.29,6210.87 4199.29,6237.28 D1.1 4212.01,6310.04 4300,6398.03 K1.8
NetC10_2: C10.2 D2.1 K2.8 Q2.3 | length 559.9
  Top Layer w10: Q2.3 4200,4852.76 C10.2 4200,5187.99 D2.1 4212.01,5200.98 4300,5288.98 K2.8
NetC16_2: C16.2 D3.1 K3.8 Q3.3 | length 559.9
  Top Layer w10: Q3.3 4200,3752.76 C16.2 4200,4087.99 D3.1 4212.01,4142.72 4300,4230.71 K3.8
NetC17_1: C17.1 R10.2 U3.7 | length 101.2
  Top Layer w10: R10.2 3202.95,4086.45 C17.1
NetC18_2: C18.2 J3.1 R11.1 U4.23
NetJ1_2: J1.2
NetJ1_3: J1.3 U4.24
NetJ1_4: J1.4 R2.2 U4.10
NetJ1_5: J1.5 U4.11
NetJ1_6: J1.6 U4.25
NetJ3_7: J3.7 U4.22
NetJ4_1: J4.1 U4.20
NetJ4_3: J4.3 U4.21
NetLED1_2: LED1.2 R12.2
NetLED2_2: LED2.2 R13.2
NetLED3_2: LED3.2 R14.2
NetQ1_1: Q1.1 R13.1
NetQ2_1: Q2.1 R14.1
NetQ3_1: Q3.1 R12.1
NetR1_2: R1.2
NetR3_1: R3.1 R5.2 U2.4
NetR4_1: R4.1 U2.5
NetR6_1: R6.1 R9.2 U3.3 | length 317.5
  Top Layer w10: R9.2 R6.1 2905.91,4267.32 2938.58,4300 U3.3
NetR7_1: R7.1 R8.1 U3.5
PS_Button: B3.1 B3.2 R17.1 U4.4
pads on no net: J3.2 J3.3 J3.5 J3.6 J3.8 J3.10 J3.11 J3.12 J3.13 J3.14 J4.2 U3.11 U4.1 U4.6 U4.7 U4.8 U4.9 U4.12 U4.13 U4.14 U4.15 U4.16 U4.17 U4.18 U4.19 U4.26 U4.27 U4.28 U4.29 U4.31 U4.32 U4.33 U4.34 U4.35 U4.38 U4.39 U4.40 U4.41 U4.42 U4.43 U4.45 U4.46 U4.49 U4.50 U4.51 U4.52 U4.53 U4.54 U4.55 U4.56 U4.57 U4.58 U4.59 U4.60 U4.61
copper on no net: | length 27814.8
  Top Layer w10: v1(2900,4750) 2974.8,4750 ; 970,1020 8910,1020 8910,6950 970,6950 970,1020
  other v2: 3194.88,4262.6 3172.24,4300 3217.52,4300 3194.88,4337.4

## Polygon pours and split planes (outlines as drawn)
no net on 5V (split plane): 8889.9,1040.1 990.1,1040.1 990.1,6929.9 8889.9,6929.9
no net on 3.3V (split plane): 8889.9,1040.1 990.1,1040.1 990.1,6929.9 8889.9,6929.9
no net on GROUND (split plane): 8889.9,1040.1 990.1,1040.1 990.1,6929.9 8889.9,6929.9
no net on Layer 2 (split plane): 8889.9,1040.1 990.1,1040.1 990.1,6929.9 8889.9,6929.9